# EAGLE board KKCTBN Batuta 2022 (EAGLE 9.6.1)
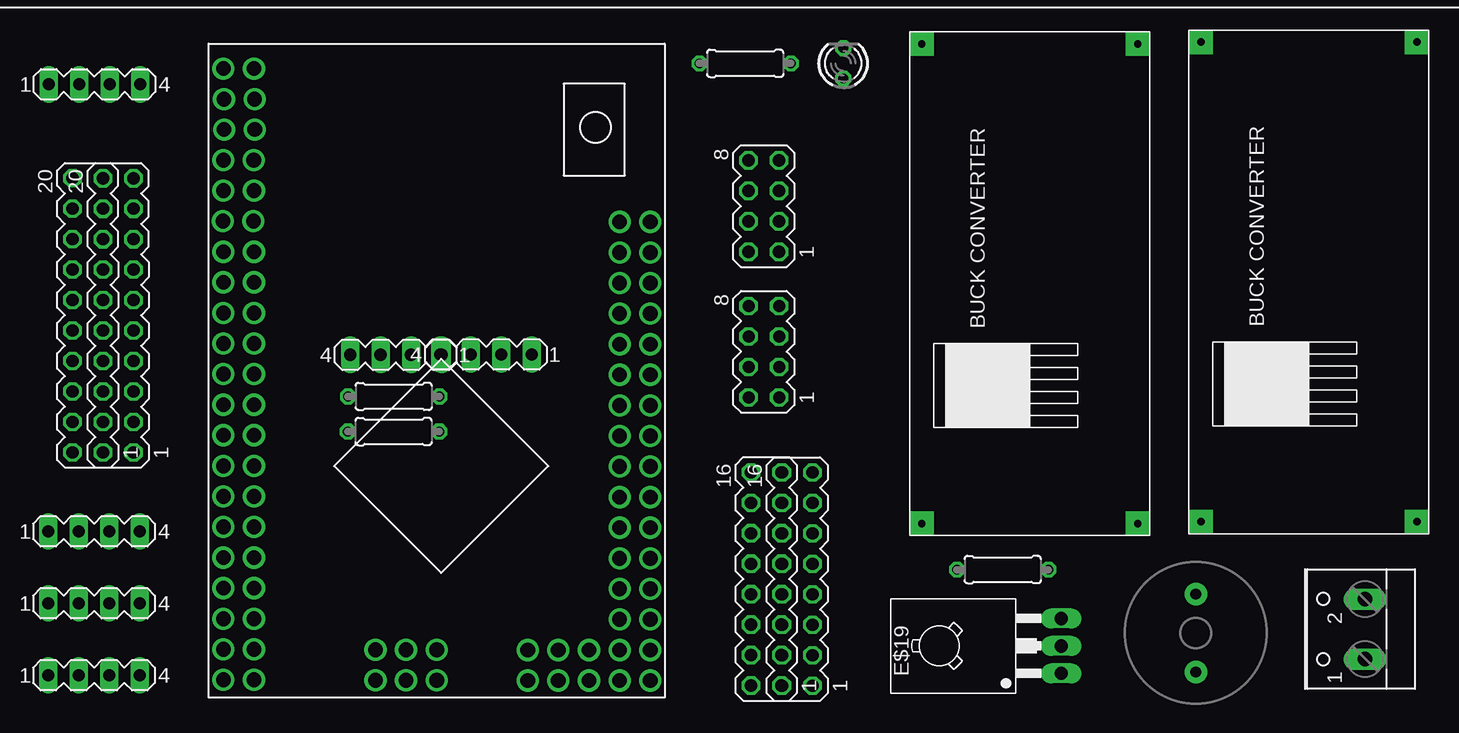
[diagram p0: board, top side]
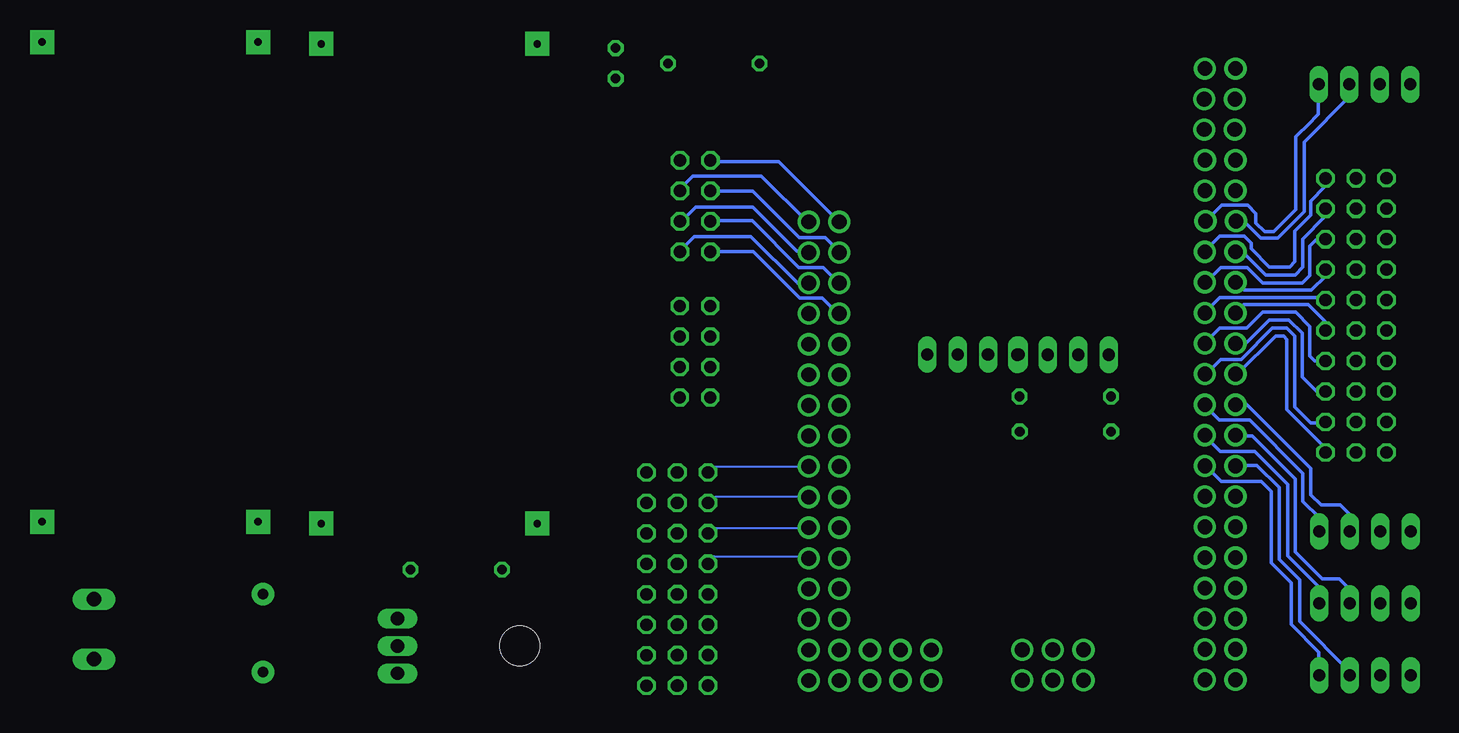
[diagram p1: board, bottom side, seen from below]

No outline drawn. Coordinates in mm, seen from the top.
Copper layers (1*16): Top 0.035mm / dielectric 1.5mm / Bottom 0.035mm
Design rules "default": minimum track width 6mil, minimum drill 0.35mm, track to track 6mil, track to pad 6mil, pad to pad 6mil, via to via 6mil, smd to smd 6mil, copper to edge 40mil, drill to drill 6mil, minimum pad ring 10mil, minimum via ring 8mil, stop-mask expansion 4mil, vias tented up to drill 0mil, thermal gap 10mil

## Footprints (pad centres in the part's own frame; a part is rotated, then mirrored left to right if it is on the bottom)
MEGA_PROMINI2560 = drill 1.23: 3V3(0) -14.06,12.72; 3V3(1) -16.6,12.72; 5V(0) -16.539,15.281; 5V(1) -13.989,15.281; 5V(2) 1.17,-30.65; A0 18.965,7.575; A1 16.415,7.575; A2 18.965,5.025; A3 16.415,5.025; A4 18.965,2.475; A5 16.415,2.475; A6 18.965,-0.075; A7 16.415,-0.075; A8 18.965,-2.625; A9 16.415,-2.625; A10 18.965,-5.175; A11 16.415,-5.175; A12 18.965,-7.725; A13 16.415,-7.725; A14 18.965,-10.275; A15 16.415,-10.275; AREF -14.05,10.175; D0 -14.1,7.65; D1 -16.64,7.65; D2 -14.05,5.085; D3 -16.6,5.085; D4 -14.05,2.535; D5 -16.6,2.535; D6 -14.05,-0.015; D7 -16.6,-0.015; D8 -14.05,-2.565; D9 -16.6,-2.565; D10 -14.05,-5.115; D11 -16.6,-5.115; D12 -14.05,-7.665; D13 -16.6,-7.665; D14 -14.05,-10.215; D15 -16.6,-10.215; D16 -14.05,-12.765; D17 -16.6,-12.765; D18 -14.05,-15.315; D19 -16.6,-15.315; D20 -14.05,-17.865; D21 -16.6,-17.865; D22 -14.05,-20.415; D23 -16.6,-20.415; D24 -14.05,-22.965; D25 -16.6,-22.965; D26 -14.05,-25.515; D27 -16.6,-25.515; D28 -14.05,-28.065; D29 -16.6,-28.065; D30 -14.05,-30.615; D31 -16.6,-30.615; D32 18.965,-12.825; D33 16.415,-12.825; D34 18.965,-15.375; D35 16.415,-15.375; D36 18.965,-17.925; D37 16.415,-17.925; D38 18.965,-20.475; D39 16.415,-20.475; D40 18.965,-23.025; D41 16.415,-23.025; D42 18.965,-25.575; D43 16.415,-25.575; D44 18.965,-28.125; D45 16.415,-28.125; D46 18.965,-30.675; D47 16.415,-30.675; D48 13.865,-30.675; D49 13.865,-28.125; D50 11.315,-30.675; D51 11.315,-28.125; D52 8.765,-30.675; D53 8.765,-28.125; GND0 -14,17.815; GND1 -16.55,17.815; GND2 -3.93,-30.65; MISO 1.17,-28.1; MOSI -1.38,-30.65; RESET -3.93,-28.1; RST -16.6,10.175; SCK -1.38,-28.1; VIN0 -14.05,20.365; VIN1 -16.6,20.365
MA04-1 = drill 1.016 long: 1 -3.81,0; 2 -1.27,0; 3 1.27,0; 4 3.81,0
MA10-2 = drill 1.016 octagon: 1 -11.43,-1.27; 2 -11.43,1.27; 3 -8.89,-1.27; 4 -8.89,1.27; 5 -6.35,-1.27; 6 -6.35,1.27; 7 -3.81,-1.27; 8 -3.81,1.27; 9 -1.27,-1.27; 10 -1.27,1.27; 11 1.27,-1.27; 12 1.27,1.27; 13 3.81,-1.27; 14 3.81,1.27; 15 6.35,-1.27; 16 6.35,1.27; 17 8.89,-1.27; 18 8.89,1.27; 19 11.43,-1.27; 20 11.43,1.27
MA04-2 = drill 1.016 octagon: 1 -3.81,-1.27; 2 -3.81,1.27; 3 -1.27,-1.27; 4 -1.27,1.27; 5 1.27,-1.27; 6 1.27,1.27; 7 3.81,-1.27; 8 3.81,1.27
MA08-2 = drill 1.016 octagon: 1 -8.89,-1.27; 2 -8.89,1.27; 3 -6.35,-1.27; 4 -6.35,1.27; 5 -3.81,-1.27; 6 -3.81,1.27; 7 -1.27,-1.27; 8 -1.27,1.27; 9 1.27,-1.27; 10 1.27,1.27; 11 3.81,-1.27; 12 3.81,1.27; 13 6.35,-1.27; 14 6.35,1.27; 15 8.89,-1.27; 16 8.89,1.27
BUCK_CONV = drill 0.6 pad 2 square: IN+ -17,48; IN- -17,30; OUT+ 23,48; OUT- 23,30
W237-102 = drill 1.194 long: 1 -2.5,-1.27; 2 2.5,-1.27
0207/7 = drill 0.813 octagon: 1 -3.81,0; 2 3.81,0
LED3MM = drill 0.813 octagon: A -1.27,0; K 1.27,0
BUZZER-12MM-NS-KIT = drill 0.9 pad 1.88: + 3.25,0; - -3.25,0
TO126 = drill 1.118 long: 1 -2.286,-5.08; 2 0,-5.08; 3 2.286,-5.08 | hole 3.302: 0,5.08

## Placement (x,y rotation side)
E$1  [MEGA_PROMINI2560]  39.37,62.23 0 top
E$2  [MA04-1]  12.02,81.28 0 top
E$3  [MA04-1]  11.99,44 0 top
E$4  [MA04-1]  11.99,38 0 top
E$5  [MA04-1]  11.99,32 0 top
E$6  [MA10-2]  14.01,62.01 90 top
E$7  [MA04-1]  44.66,58.75 180 top
E$8  [MA04-2]  67.8,71.12 90 top
E$9  [MA04-2]  67.81,58.98 90 top
E$10  [MA08-2]  68,40.03 90 top
E$11  [BUCK_CONV]  128.97,61.65 90 top
E$12  [W237-102]  116.63,35.85 90 top
E$13  [0207/7]  36.96,55.25 180 top
E$14  [0207/7]  36.95,52.32 180 top
E$15  [0207/7]  66.25,83.02 180 top
E$16  [LED3MM]  74.43,83.03 90 top
E$17  [BUCK_CONV]  152.23,61.81 90 top
E$18  [BUZZER-12MM-NS-KIT]  103.81,35.52 270 top
E$19  [TO126]  87.51,34.45 90 top
E$20  [0207/7]  87.71,40.81 180 top
E$21  [MA04-1]  37.14,58.72 180 top
E$22  [MA08-2]  70.59,40.02 90 top
E$23  [MA10-2]  11.46,62.02 90 top

## Library data of the parts
E$1 = MEGA_PROMINI2560
E$2-E$10 E$21-E$23 = con-lstb
E$11 E$17 = KRSBI COMPONENT
E$12 = con-wago-500
E$13-E$15 E$20 = rcl
E$16 = led
E$18 = SparkFun-Electromechanical
E$19 = transistor

## Tracks (layer width: path | path; a pad name or v marks a point on that pad's centre or on a via)
S$1
  Bottom 0.3: 22.81,64.87 22.06,64.12 16.45,64.12 15.27,65.3 15.27,65.86
S$2
  Bottom 0.3: 22.75,67.39 22.26,67.39 20.24,65.37 17.81,65.37 17.16,66.02 17.16,68.39 15.32,70.23 15.32,70.9
S$3
  Bottom 0.3: 25.24,64.77 24,66.01 21.81,66.01 20.5,64.7 17.2,64.7 16.58,65.32 16.58,67.8 16.1,68.28 15.23,68.28
S$4
  Bottom 0.3: 22.82,62.18 22.1,62.9 16.71,62.9 15.33,61.52 15.33,60.7
S$5
  Bottom 0.3: 25.37,62.19 24.08,63.48 15.63,63.48 15.34,63.19
S$6
  Bottom 0.3: 25.25,59.79 24.1,60.94 21.83,60.94 20.5,62.27 17.77,62.27 16.6,61.1 16.6,58.64 16.16,58.2 15.26,58.2
S$7
  Bottom 0.3: 22.79,59.58 21.99,59.58 19.94,61.63 18.32,61.63 17.22,60.53 17.22,56.86 15.97,55.61 15.25,55.61
S$8
  Bottom 0.3: 25.33,57.02 24,58.35 22.31,58.35 19.71,60.95 18.51,60.95 17.84,60.28 17.84,54.37 16.51,53.04 15.37,53.04
S$9
  Bottom 0.3: 22.61,57.11 19.43,60.29 18.76,60.29 18.48,60.01 18.48,54.15 15.3,50.97 15.3,50.48
S$10
  Bottom 0.3: 25.34,67.37 24.09,68.62 22.06,68.62 21.47,68.03 21.47,67.58 19.95,66.06 18.27,66.06 17.85,66.48 17.85,69.03 16.52,70.36 16.52,71.53 15.32,72.73 15.32,73.46
S$11
  Bottom 0.3: 55.82,69.83 60.83,74.84 66.67,74.84
S$12
  Bottom 0.3: 69.14,72.48 67.98,73.64 62.28,73.64 58.38,69.74
S$13
  Bottom 0.3: 55.69,67.22 56.96,68.49 59.12,68.49 62.99,72.36 66.59,72.36
S$14
  Bottom 0.3: 69.02,69.78 67.74,71.06 63,71.06 59.33,67.39 58.45,67.39
S$15
  Bottom 0.3: 55.76,64.63 57.12,65.99 59.15,65.99 63.06,69.9 66.57,69.9
S$16
  Bottom 0.3: 69.12,67.35 67.88,68.59 63.16,68.59 59.26,64.69 58.21,64.69
S$17
  Bottom 0.3: 55.86,62.09 57.22,63.45 59.07,63.45 62.97,67.35 66.57,67.35
S$23
  Bottom 0.152: 66.66,48.97 66.22,49.41 58.44,49.41
S$24
  Bottom 0.152: 66.71,46.3 66.1,46.91 58.24,46.91
S$25
  Bottom 0.152: 66.74,43.83 66.26,44.31 58.45,44.31
S$26
  Bottom 0.152: 66.85,41.3 66.22,41.93 58.56,41.93
S$27
  Bottom 0.3: 22.73,51.94 21.37,51.94 17.79,48.36 17.79,42.28 15.54,40.03 14.11,40.03 13.19,39.11 13.19,38.05
S$28
  Bottom 0.3: 25.47,52.09 24.06,50.68 21.15,50.68 18.4,47.93 18.4,41.96 15.83,39.39 15.83,38.08
S$29
  Bottom 0.3: 22.91,49.5 20.99,49.5 19.14,47.65 19.14,41.68 17.41,39.95 17.41,36.48 13.23,32.3 13.23,31.85 13.14,31.76
S$30
  Bottom 0.3: 25.27,49.48 23.94,48.15 20.61,48.15 19.81,47.35 19.81,41.36 18.14,39.69 18.14,36.24 15.82,33.92 15.82,32.05
S$32
  Bottom 0.3: 22.69,70.02 22.23,70.02 20.66,68.45 19.27,68.45 17.06,70.66 17.06,76.47 13.28,80.25 13.28,81.16
S$33
  Bottom 0.3: 25.34,69.78 23.92,71.2 21.76,71.2 21.07,70.51 21.07,69.72 20.34,68.99 19.58,68.99 17.74,70.83 17.74,76.91 16.6,78.05 16.04,78.61 15.86,78.79 15.86,81.29
S$35
  Bottom 0.3: 22.7,54.61 21.86,54.61 16.49,49.24 16.49,47.06 15.64,46.21 14.05,46.21 13.26,45.42 13.26,44.07
S$37
  Bottom 0.3: 25.32,54.49 24.11,53.28 21.6,53.28 17.15,48.83 17.15,46.5 15.77,45.12 15.77,43.81